# Altium PCB PWM_Module_TYPE2242.PcbDoc
Units mm, origin at the board's own origin, x right, y up, seen from the top; angles counter-clockwise.
Board outline 42 x 21.99 mm, 4 copper layers (Top Layer, Int1 (GND), Int2 (PWR), Bottom Layer), stack 0.77 mm thick; 32 components, 51 nets, 150 pads, 89 vias.
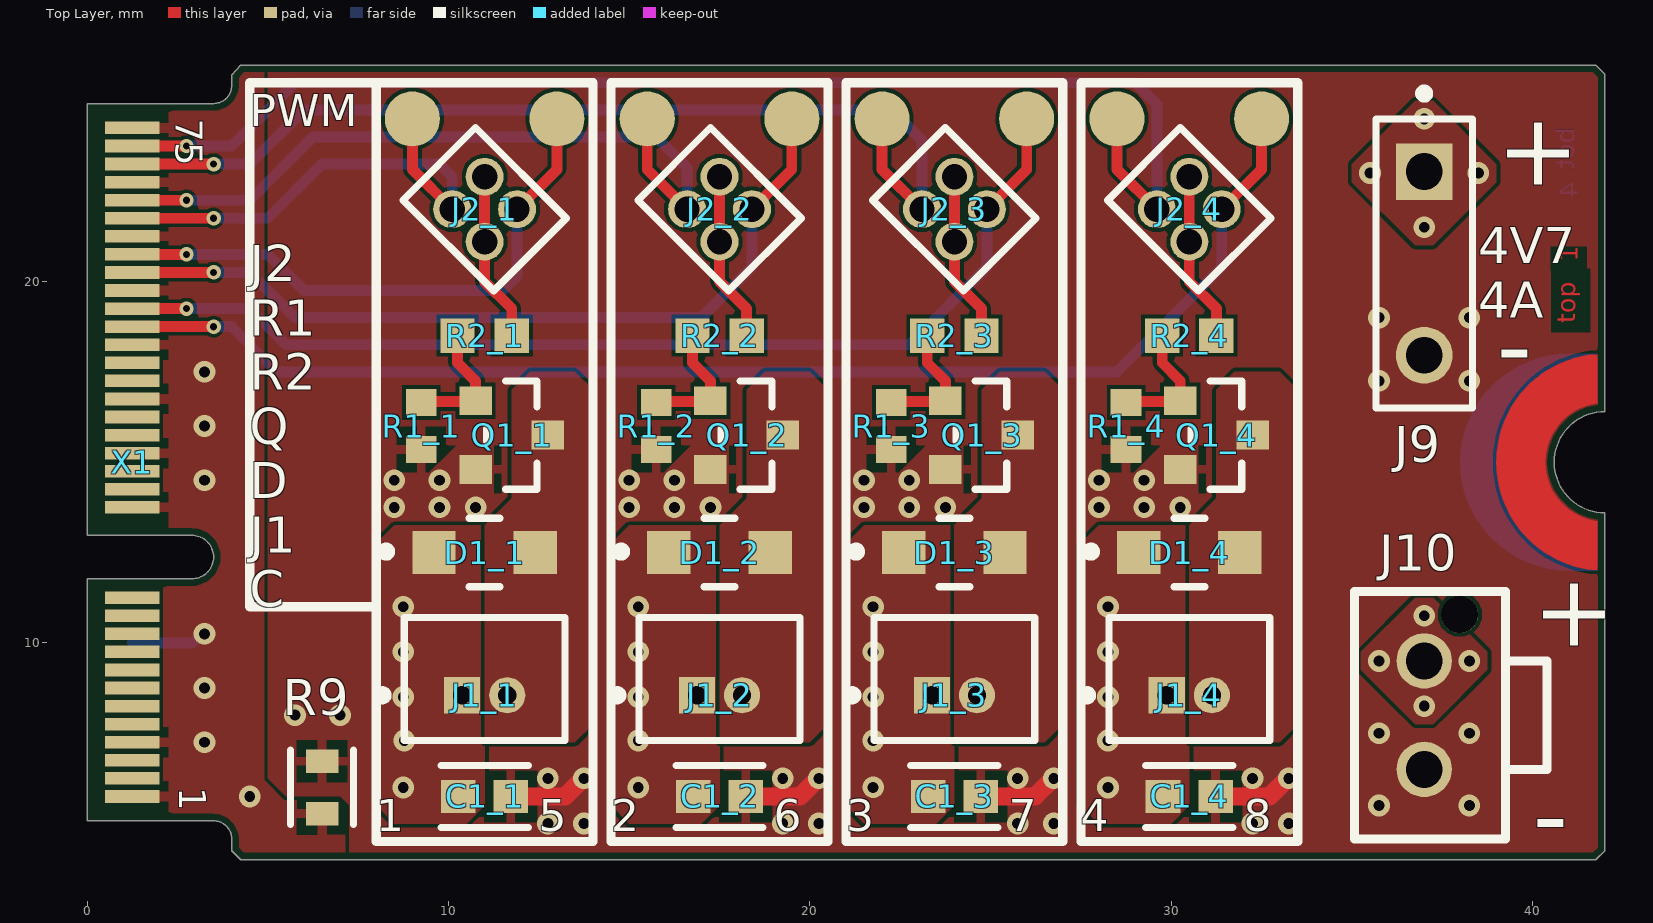
[diagram p0: Top Layer view]
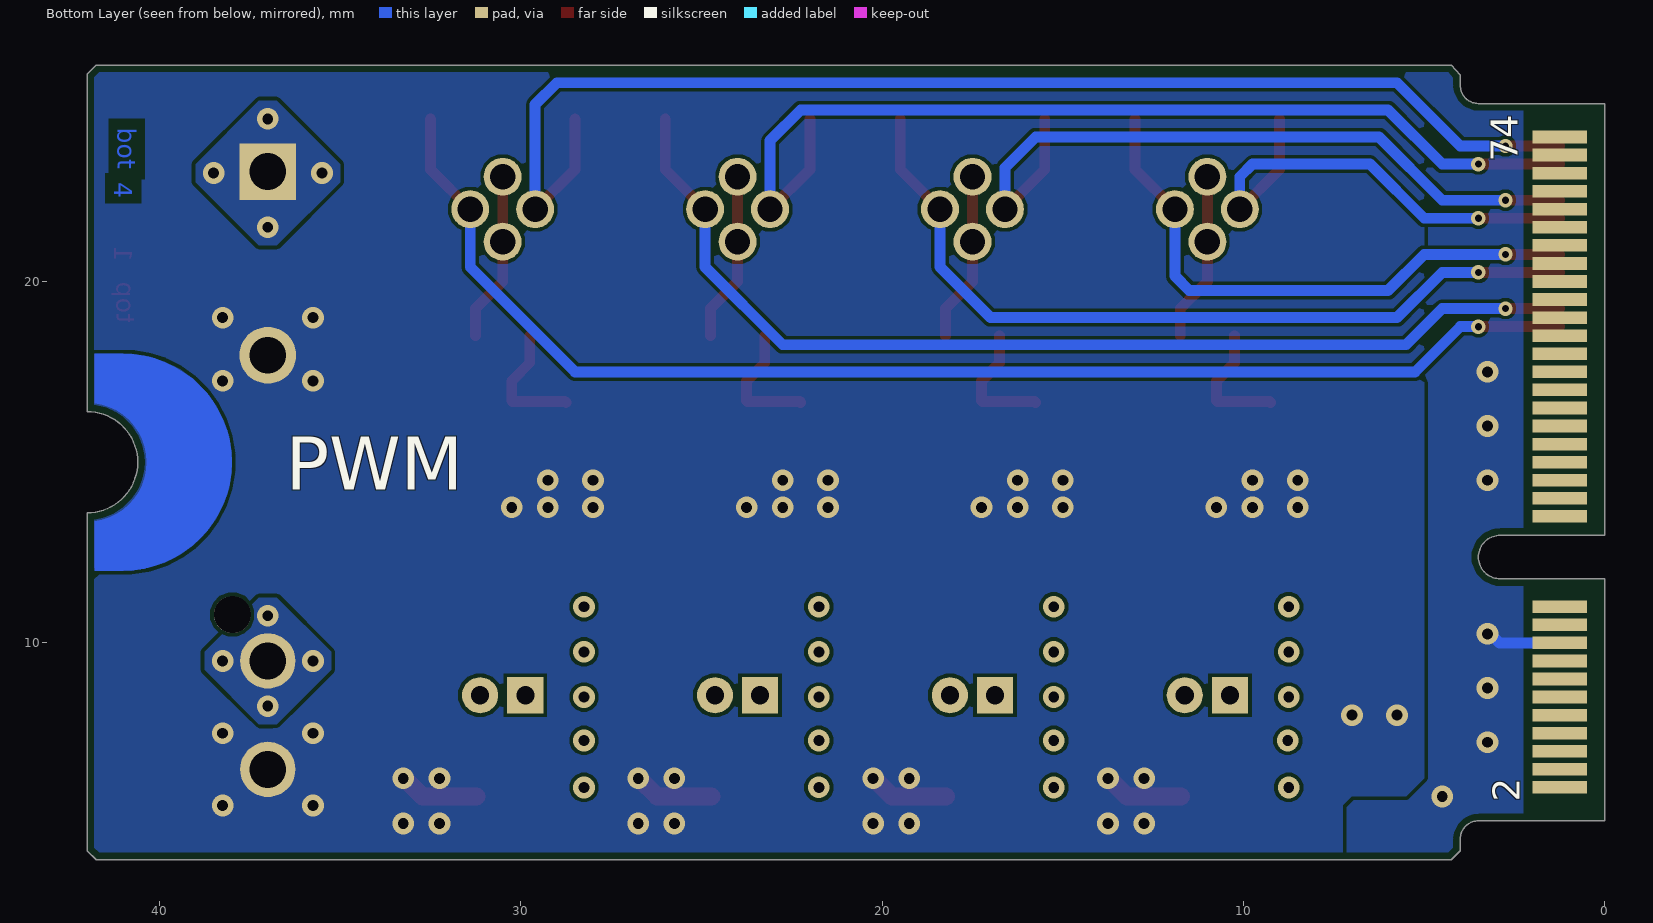
[diagram p1: Bottom Layer view, seen from below]
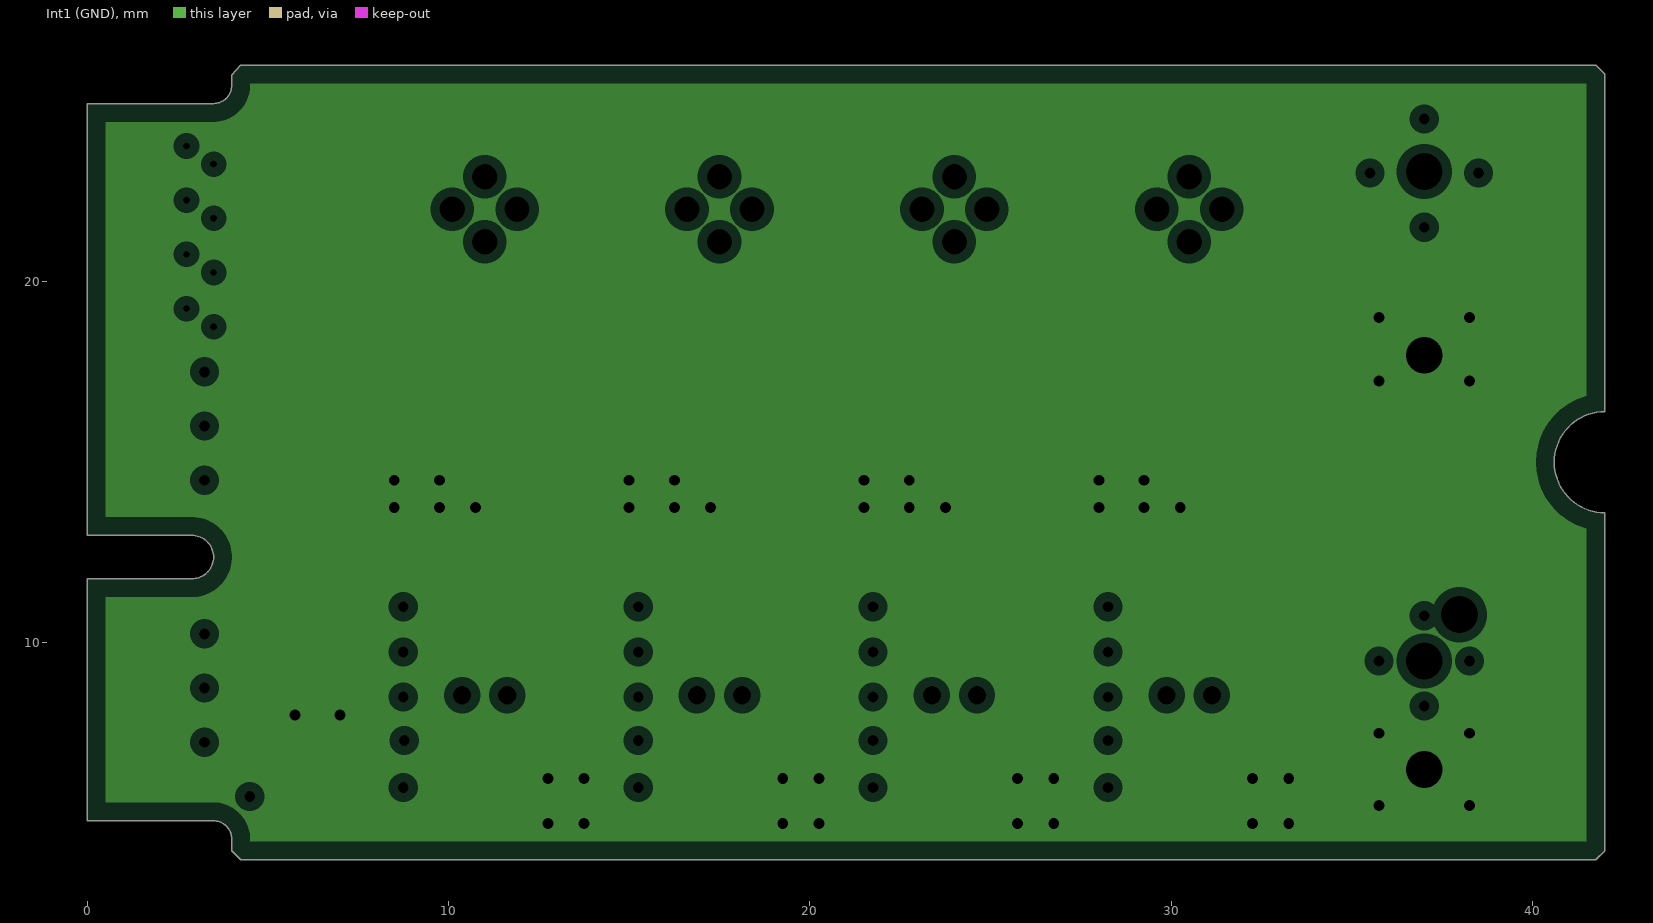
[diagram p2: Int1 (GND), clearances drawn from the general rule]
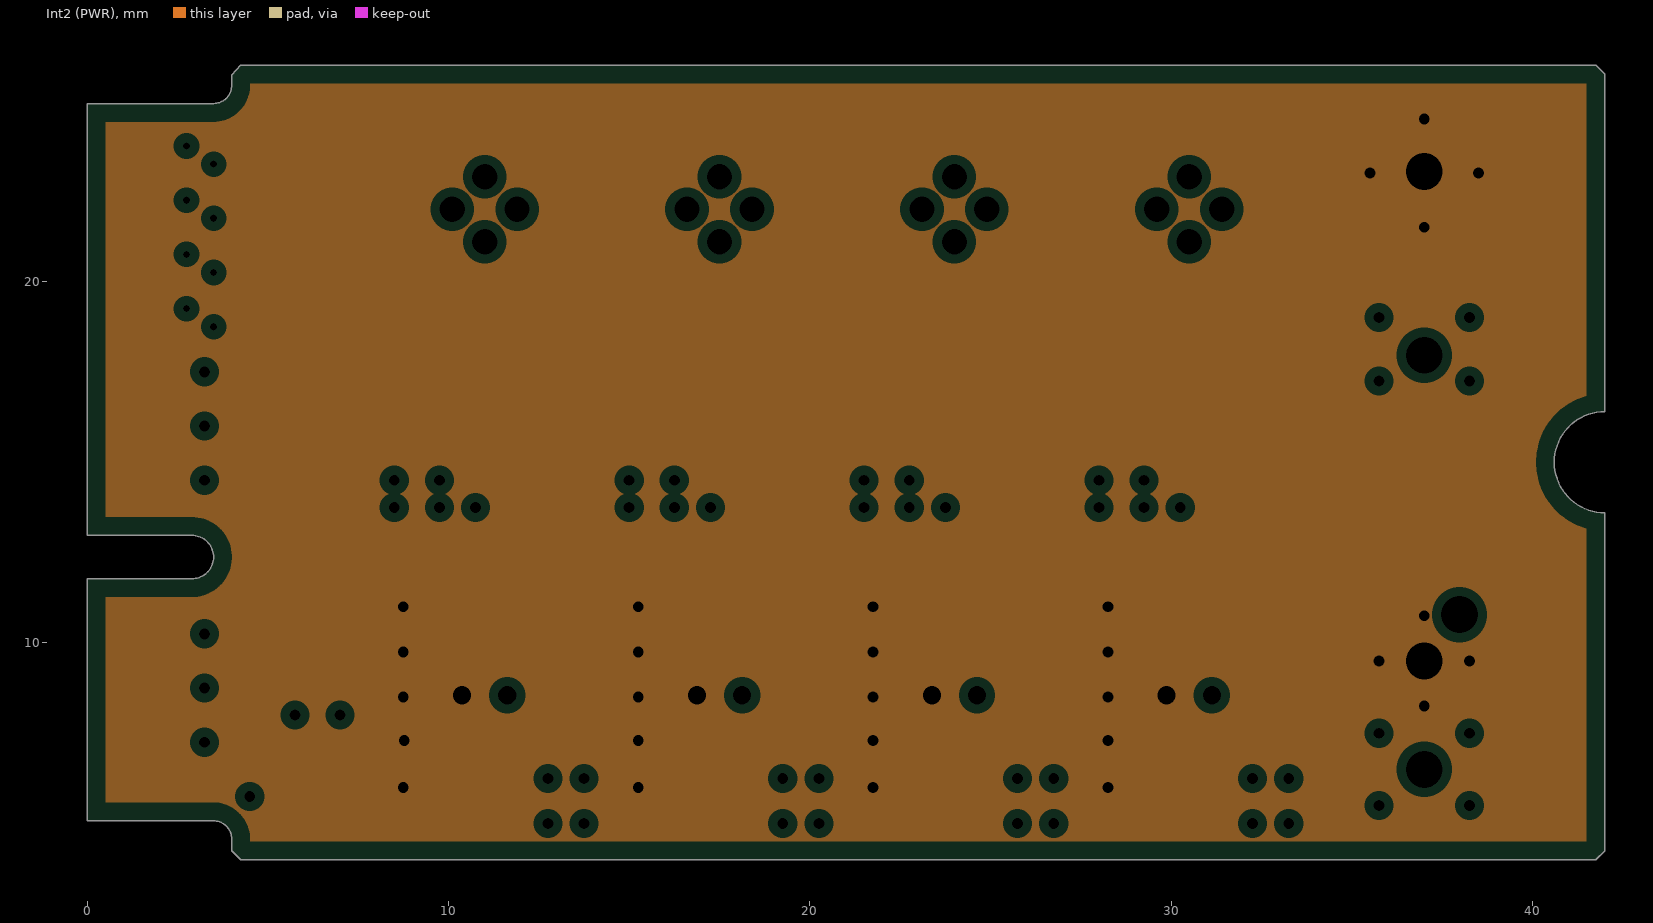
[diagram p3: Int2 (PWR), clearances drawn from the general rule]
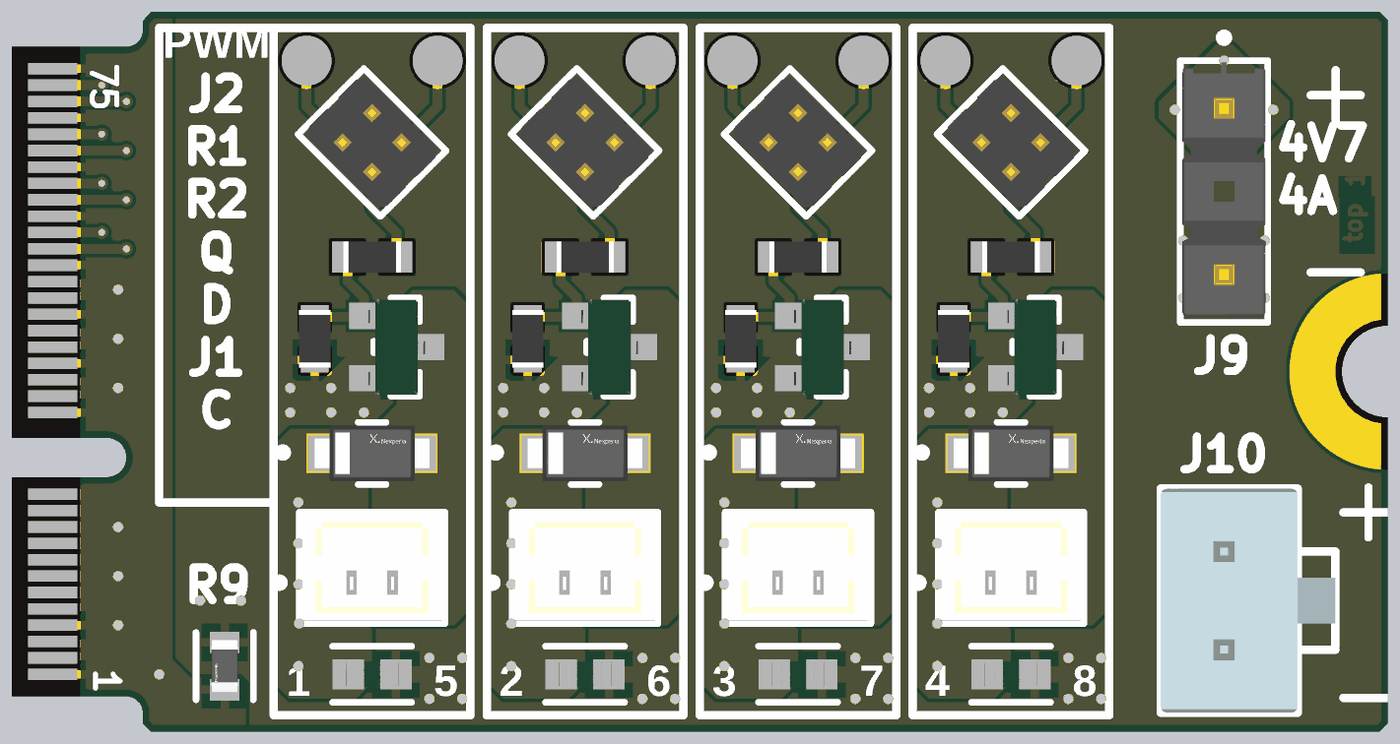
[diagram p4: 3D render of the assembled board from above, using the file's embedded part models]

## Layer stack, top to bottom
Top Solder: solder mask 0.0254, SM-001, Dk 4
Top Layer: signal copper 0.035
Dielectric 1: prepreg 0.1118, PP-015, Dk 4.3
Int1 (GND): plane copper 0.035, net BAT-
Dielectric 3: core 0.4064, Core-034, Dk 4.6
Int2 (PWR): plane copper 0.035, net BAT+
Dielectric 5: prepreg 0.1118, PP-015, Dk 4.3
Bottom Layer: signal copper 0.035
Bottom Solder: solder mask 0.0254, SM-001, Dk 4

## Board outline
4,4.25 4,4.575 ccw(c3.5,4.575) 3.5,5.075 0,5.075 0,11.775 2.9,11.775 ccw(c2.9,12.375) 3.5,12.375 ccw(c2.9,12.375) 2.9,12.975 0,12.975 0,24.925 3.5,24.925 ccw(c3.5,25.425) 4,25.425 4,25.713 4.25,25.988 41.75,25.988 42,25.738 42,16.4 ccw(c42,15) 40.6,15 ccw(c42,15) 42,13.6 42,4.25 41.75,4 4.25,4

## Design rules (kind name [scope] priority, off if disabled: settings)
BoardOutlineClearance [All] p1: gap=0.2 ignorepadtopadclearanceinfootprint=FALSE
Clearance [All] p1: gap=0.1 ignorepadtopadclearanceinfootprint=FALSE
DiffPairsRouting DiffPairsRouting_100R [InDifferentialPairClass('DP_100R')] p1: maxlimit=0.15 minlimit=0.15 mostfreqgap=0.15 toplayer_minwidth=0.11 toplayer_maxwidth=0.11 toplayer_prefwidth=0.11 bottomlayer_minwidth=0.11 bottomlayer_maxwidth=0.11 bottomlayer_prefwidth=0.11 impedanceprofiledriven=TRUE impedanceprofileid={D0ED966C-66EA-42B8-8657-787F2A77329B} impedanceprofilevalue=100.000000 maxuncoupledlength=12.7
DiffPairsRouting [All] p2: maxlimit=0.254 minlimit=0.254 mostfreqgap=0.254 toplayer_minwidth=0.381 toplayer_maxwidth=0.381 toplayer_prefwidth=0.381 bottomlayer_minwidth=0.381 bottomlayer_maxwidth=0.381 bottomlayer_prefwidth=0.381 maxuncoupledlength=12.7
MatchedLengths MatchedLengths_1 [InNetClass('S_GP2')] p1: tolerance=1 checknetsindiffpair=FALSE checkdiffpairvsdiffpair=TRUE checkxsignals=TRUE checkothers=TRUE
MatchedLengths [InNetClass('S_GP')] p2: tolerance=1 checknetsindiffpair=FALSE checkdiffpairvsdiffpair=TRUE checkxsignals=TRUE checkothers=TRUE
PlaneClearance [All] p1: clearance=0.254
PlaneConnect [All] p1: pad.planeconnectstyle=Relief pad.reliefexpansion=0.508 pad.reliefentries=4 pad.reliefconductorwidth=0.254 pad.reliefairgap=0.254 via.planeconnectstyle=Direct via.reliefexpansion=0.508 via.reliefentries=4 via.reliefconductorwidth=0.254 via.reliefairgap=0.254
PolygonConnect PolygonConnect_7 [All vs IsNamedPolygon('BAT-_L01_P029') Or IsNamedPolygon('BAT-_L01_P030') Or IsNamedPolygon('BAT-_L01_P031') Or IsNamedPolygon('BAT-_L01_P032')] p1: connectstyle=Direct reliefconductorwidth=0.254 reliefentries=4 polygonreliefangle="90 Angle" airgapwidth=0.254
PolygonConnect PolygonConnect_6 [All vs IsNamedPolygon('BAT-_L04_P021') Or IsNamedPolygon('BAT-_L04_P021')] p2: connectstyle=Direct reliefconductorwidth=0.254 reliefentries=4 polygonreliefangle="90 Angle" airgapwidth=0.254
PolygonConnect PolygonConnect_5 [All vs IsNamedPolygon('BAT-_L01_P025') Or IsNamedPolygon('BAT-_L01_P026')] p3: connectstyle=Direct reliefconductorwidth=0.254 reliefentries=4 polygonreliefangle="90 Angle" airgapwidth=0.254
PolygonConnect PolygonConnect_4 [All vs IsNamedPolygon('BAT+_L04_P000') Or IsNamedPolygon('BAT+_L04_P020')] p4: connectstyle=Direct reliefconductorwidth=0.254 reliefentries=4 polygonreliefangle="90 Angle" airgapwidth=0.254
PolygonConnect PolygonConnect_3 [All vs IsNamedPolygon('BAT+_L01_P018') Or IsNamedPolygon('BAT+_L01_P019')] p5: connectstyle=Direct reliefconductorwidth=0.254 reliefentries=4 polygonreliefangle="90 Angle" airgapwidth=0.254
PolygonConnect PolygonConnect_2 [All vs IsNamedPolygon('BAT+_L01_PWM1') Or IsNamedPolygon('BAT+_L01_PWM2') Or IsNamedPolygon('BAT+_L01_PWM3') Or IsNamedPolygon('BAT+_L01_PWM4')] p6: connectstyle=Direct reliefconductorwidth=0.254 reliefentries=4 polygonreliefangle="90 Angle" airgapwidth=0.254
PolygonConnect PolygonConnect_1 [All vs IsNamedPolygon('SW1_L01_PWM1') Or IsNamedPolygon('SW2_L01_PWM2') Or IsNamedPolygon('SW3_L01_PWM3') Or IsNamedPolygon('SW4_L01_PWM4')] p7: connectstyle=Direct reliefconductorwidth=0.254 reliefentries=4 polygonreliefangle="90 Angle" airgapwidth=0.254
PolygonConnect [All] p8: thpad.connectstyle=Relief thpad.reliefconductorwidth=0.254 thpad.reliefentries=4 thpad.polygonreliefangle="90 Angle" thpad.airgapwidth=0.254 smdpad.connectstyle=Relief smdpad.reliefconductorwidth=0.254 smdpad.reliefentries=4 smdpad.polygonreliefangle="90 Angle" smdpad.airgapwidth=0.254 via.connectstyle=Direct via.reliefconductorwidth=0.254 via.reliefentries=4 via.polygonreliefangle="90 Angle" via.airgapwidth=0.254
RoomDefinition PWM3 [InComponentClass('PWM3')] p1: confinementstyle=ConfineIn formatcopy=TRUE lockcomponents=FALSE outline 27,4.5 27,25.5 21,25.5 21,4.5
RoomDefinition PWM4 [InComponentClass('PWM4')] p2: confinementstyle=ConfineIn formatcopy=TRUE lockcomponents=FALSE outline 33.5,4.5 33.5,25.5 27.5,25.5 27.5,4.5
RoomDefinition PWM2 [InComponentClass('PWM2')] p3: confinementstyle=ConfineIn formatcopy=TRUE lockcomponents=FALSE outline 20.5,4.5 20.5,25.5 14.5,25.5 14.5,4.5
RoomDefinition PWM1 [InComponentClass('PWM1')] p4: confinementstyle=ConfineIn formatcopy=TRUE lockcomponents=FALSE outline 14,4.5 14,25.5 8,25.5 8,4.5
RoutingVias [All] p1: holewidth=0.2 width=0.4 viastyle="Through Hole" minholewidth=0.2 minwidth=0.4 maxholewidth=3 maxwidth=6
SolderMaskExpansion [All] p1: expansion=0.102 istentingtop=FALSE
Width Width_50R [InNetClass('SE_50R')] p1: maxlimit=0.172 minlimit=0.172 preferedwidth=0.172 impedanceprofiledriven=TRUE impedanceprofileid={CEA07893-88F1-4413-85C8-7467995CDE0A} impedanceprofilevalue=50.000000 minimp=50.000000 maximp=50.000000 favimp=50.000000
Width [All] p2: maxlimit=4 minlimit=0.1 preferedwidth=0.125
27 further rules are at their usual default settings.

## Classes and differential pairs
component class PWM4: C1_4 D1_4 J1_4 J2_4 Q1_4 R1_4 R2_4
component class PWM2: C1_2 D1_2 J1_2 J2_2 Q1_2 R1_2 R2_2
component class PWM1: C1_1 D1_1 J1_1 J2_1 Q1_1 R1_1 R2_1
component class PWM3: C1_3 D1_3 J1_3 J2_3 Q1_3 R1_3 R2_3
differential pair class DP_100R: FMC_GP_D1 FMC_GP_D2 FMC_GP_D3 FMC_GP_D4 FMC_GP_D5 FMC_GP_D6 FMC_GP_D7
net class SE_50R: FMC_GP_S0 FMC_GP_S1 FMC_GP_S2 FMC_GP_S3 FMC_GP_S4 FMC_GP_S5 FMC_GP_S6
net class S_GP: FMC_GP_S0 FMC_GP_S1 FMC_GP_S2 FMC_GP_S3 FMC_GP_S4 FMC_GP_S5 FMC_GP_S6
net class FMC_GP_S[0..7]: FMC_GP_S0 FMC_GP_S1 FMC_GP_S2 FMC_GP_S3 FMC_GP_S4 FMC_GP_S5 FMC_GP_S6 FMC_GP_S7
net class FMC_GP_D_P[0..7]: FMC_GP_D_P0 FMC_GP_D_P1 FMC_GP_D_P2 FMC_GP_D_P3 FMC_GP_D_P4 FMC_GP_D_P5 FMC_GP_D_P6 FMC_GP_D_P7
net class FMC_GP_D_N[0..7]: FMC_GP_D_N0 FMC_GP_D_N1 FMC_GP_D_N2 FMC_GP_D_N3 FMC_GP_D_N4 FMC_GP_D_N5 FMC_GP_D_N6 FMC_GP_D_N7
net class DP_GP: FMC_GP_D_N1 FMC_GP_D_N2 FMC_GP_D_N3 FMC_GP_D_N4 FMC_GP_D_N5 FMC_GP_D_N6 FMC_GP_D_N7 FMC_GP_D_P1 FMC_GP_D_P2 FMC_GP_D_P3 FMC_GP_D_P4 FMC_GP_D_P5 FMC_GP_D_P6 FMC_GP_D_P7
component class connector: X1
differential pair FMC_GP_D7: +FMC_GP_D_P7 -FMC_GP_D_N7
differential pair FMC_GP_D6: +FMC_GP_D_P6 -FMC_GP_D_N6
differential pair FMC_GP_D5: +FMC_GP_D_P5 -FMC_GP_D_N5
differential pair FMC_GP_D4: +FMC_GP_D_P4 -FMC_GP_D_N4
differential pair FMC_GP_D3: +FMC_GP_D_P3 -FMC_GP_D_N3
differential pair FMC_GP_D2: +FMC_GP_D_P2 -FMC_GP_D_N2
differential pair FMC_GP_D1: +FMC_GP_D_P1 -FMC_GP_D_N1

## Components (designator, comment, footprint, x,y, rotation, side; value= is the part's Value field where it differs from the comment)
C1_1 "22u" FP-CL10-IPC_B 11,5.75 r180 top
C1_2 "22u" FP-CL10-IPC_B 17.5,5.75 r180 top
C1_3 "22u" FP-CL10-IPC_B 24,5.75 r180 top
C1_4 "22u" FP-CL10-IPC_B 30.5,5.75 r180 top
D1_1 "PMEG4030ER,115" FP-SOD123W-MFG 11,12.5 r0 top
D1_2 "PMEG4030ER,115" FP-SOD123W-MFG 17.5,12.5 r0 top
D1_3 "PMEG4030ER,115" FP-SOD123W-MFG 24,12.5 r0 top
D1_4 "PMEG4030ER,115" FP-SOD123W-MFG 30.5,12.5 r0 top
J1_1 "53047-0210" FP-53047-0210-MFG 11,9 r180 top
J1_2 "53047-0210" FP-53047-0210-MFG 17.5,9 r180 top
J1_3 "53047-0210" FP-53047-0210-MFG 24,9 r180 top
J1_4 "53047-0210" FP-53047-0210-MFG 30.5,9 r180 top
J2_1 "62200421121" 62200421121 11,22 r45 top
J2_2 "62200421121" 62200421121 17.5,22 r45 top
J2_3 "62200421121" 62200421121 24,22 r45 top
J2_4 "62200421121" 62200421121 30.5,22 r45 top
J9 "TSW-202-07-G-S" FP-TSW-202-07-G-S-MFG 37,20.5 r270 top
J10 "2165713002" PCBComponent_1 37,8 r270 top
Q1_1 "DMN2004K-7" FP-SOT23-MFG 11.75,15.75 r0 top
Q1_2 "DMN2004K-7" FP-SOT23-MFG 18.25,15.75 r0 top
Q1_3 "DMN2004K-7" FP-SOT23-MFG 24.75,15.75 r0 top
Q1_4 "DMN2004K-7" FP-SOT23-MFG 31.25,15.75 r0 top
R1_1 "10k" RESC1609X55X30LL15T15 9.25,16 r90 top
R1_2 "10k" RESC1609X55X30LL15T15 15.75,16 r90 top
R1_3 "10k" RESC1609X55X30LL15T15 22.25,16 r90 top
R1_4 "10k" RESC1609X55X30LL15T15 28.75,16 r90 top
R2_1 "47R" RESC1608X55X30NL15T15 11,18.5 r0 top
R2_2 "47R" RESC1608X55X30NL15T15 17.5,18.5 r0 top
R2_3 "47R" RESC1608X55X30NL15T15 24,18.5 r0 top
R2_4 "47R" RESC1608X55X30NL15T15 30.5,18.5 r0 top
R9 "0R" FP-ERJ-3GEY0R00V-MFG 6.5,6 r90 top
X1 "CONN PWR CARD EDGE PCB SLOT MALE" CON-67_0.5MM_PCB_SLOT 1.25,15 r270 top locked

## Footprints (in the part's own frame and the unit in brackets; to place one, negate y for a bottom-side part, rotate by r counter-clockwise, add the part's x,y. Pads: shape width x height; smd on the part's side, far side on the other; paste and mask are expansions set on the pad)
62200421121 [mm] "Pin Header, pitch 1.27 mm, THT, Vertical, dual row, 4p"
  round 1.05 hole 0.7: 1(-0.635,-0.635) 2(-0.635,0.635) 3(0.635,-0.635) 4(0.635,0.635)
  silkscreen extent -1.42,-1.77 1.42,1.77, body extent -1.27,-1.7 1.27,1.7, height 5.33
CON-67_0.5MM_PCB_SLOT [mm] "Connector 67, 0.5mm pitch - No BOM"
  rect 0.35x1.5 smd: 1(9.25,0) 3(8.75,0) 5(8.25,0) 7(7.75,0) 9(7.25,0) 11(6.75,0) 13(6.25,0) 15(5.75,0) 17(5.25,0) 19(4.75,0) 21(4.25,0) 23(3.75,0) 33(1.25,0) 35(0.75,0) 37(0.25,0) 39(-0.25,0) 41(-0.75,0) 43(-1.25,0) 45(-1.75,0) 47(-2.25,0) 49(-2.75,0) 51(-3.25,0) 53(-3.75,0) 55(-4.25,0) 57(-4.75,0) 59(-5.25,0) 61(-5.75,0) 63(-6.25,0) 65(-6.75,0) 67(-7.25,0) 69(-7.75,0) 71(-8.25,0) 73(-8.75,0) 75(-9.25,0)
  rect 0.35x1.5 smd far side: 2(9,0) 4(8.5,0) 6(8,0) 8(7.5,0) 10(7,0) 12(6.5,0) 14(6,0) 16(5.5,0) 18(5,0) 20(4.5,0) 22(4,0) 32(1.5,0) 34(1,0) 36(0.5,0) 38(0,0) 40(-0.5,0) 42(-1,0) 44(-1.5,0) 46(-2,0) 48(-2.5,0) 50(-3,0) 52(-3.5,0) 54(-4,0) 56(-4.5,0) 58(-5,0) 60(-5.5,0) 62(-6,0) 64(-6.5,0) 66(-7,0) 68(-7.5,0) 70(-8,0) 72(-8.5,0) 74(-9,0)
FP-53047-0210-MFG [mm]
  rect 1x1 hole 0.5 paste-1000 mask+0: 1(0.625,0.45)
  round 1 hole 0.5 paste-1000 mask+0: 2(-0.625,0.45)
  silkscreen extent -2.22,-1.7 2.95,1.7, body extent -2.32,-1.8 2.32,1.8, height 0.25
FP-CL10-IPC_B [mm]
  rect 0.958x0.912 smd paste+0 mask+0: 1(-0.727,0) 2(0.727,0)
  silkscreen extent -1.21,-0.86 1.21,0.86, body extent -1.46,-0.71 1.46,0.71, height 0.25
FP-ERJ-3GEY0R00V-MFG [mm]
  rect 0.65x0.9 smd paste+0 mask+0: 1(-0.725,0) 2(0.725,0)
  silkscreen extent -1.03,-0.87 1.03,0.87, body extent -1.15,-0.58 1.15,0.58, height 0.25
FP-SOD123W-MFG [mm]
  rect 1.2x1.2 smd paste-1000 mask+0: 1(-1.4,0) 2(1.4,0)
  silkscreen extent -2.85,-0.95 0.43,0.95, body extent -2.2,-1.05 2.2,1.05, height 0.25
FP-SOT23-MFG [mm]
  rect 0.9x0.8 smd paste+0 mask+0: 1(-1,0.95) 2(-1,-0.95) 3(1,0)
  silkscreen extent -0.7,-1.5 0.7,1.5, body extent -1.55,-1.6 1.55,1.6, height 0.25
FP-TSW-202-07-G-S-MFG [mm]
  rect 1.57x1.57 hole 1.02 paste-1000 mask+0: 1(-2.54,0)
  round 1.57 hole 1.02 paste-1000 mask+0: 2(2.54,0)
  silkscreen extent -4.82,-1.34 4,1.34, body extent -4.1,-1.44 4.1,1.44, height 0.25
PCBComponent_1 [mm]
  round 1.53 hole 1.02: 1(1.5,0) 2(-1.5,0)
  round 1.02 hole 1.02 unplated: H(-2.78,0.98)
  silkscreen extent -3.42,-1.93 3.42,3.4, body extent -3.42,-1.93 3.42,3.4, height 9.91
RESC1608X55X30NL15T15 [mm] "Chip Resistor, 2-Leads, Body 1.75x0.95mm, IPC Medium Density"
  rect 0.95x0.95 smd: 1(-0.75,0) 2(0.75,0)
  body extent -0.87,-0.48 0.87,0.48, height 0.55
RESC1609X55X30LL15T15 [mm] "Chip Resistor, 2-Leads, Body 1.75x0.95mm, IPC High Density"
  rect 0.75x0.85 smd: 1(-0.65,0) 2(0.65,0)
  body extent -0.87,-0.48 0.87,0.48, height 0.55

## Part data
C1_1 C1_2 C1_3 C1_4: library part CMP-13271-002755-1, "Cap Ceramic 22uF 16V X5R ±20% Pad SMD 0603 +85°C T/R", Capacitance=22uF, Case Code (Imperial)=0603, Case Code (Metric)=1608, Manufacturer=Samsung, Max Operating Temperature=85°C, Min Operating Temperature=-55°C, Tolerance=20%, Voltage Rating=16V, Case/Package=0603, Mount="Surface Mount", P/N=CL10A226MO7JZNC, Packaging="Tape and Reel", Supplier=Digi-Key, Supplier P/N=1276-7076-1-ND
  C1_1: ClassName=PWM1
  C1_2: ClassName=PWM2
  C1_3: ClassName=PWM3
  C1_4: ClassName=PWM4
D1_1 D1_2 D1_3 D1_4: library part CMP-14398-000026-1, "DIODE SCHOTTKY 40V 3A SOD123W", Manufacturer="Nexperia USA Inc.", P/N=PMEG4030ER,115, RoHS Compliant=Yes, Supplier=Digi-Key, Supplier P/N=1727-5313-1-ND
  D1_1: ClassName=PWM1
  D1_2: ClassName=PWM2
  D1_3: ClassName=PWM3
  D1_4: ClassName=PWM4
J1_1 J1_2 J1_3 J1_4: library part CMP-2000-05628-3, "CONN HEADER VERT 2POS 1.25MM", Ambient Temperature Range High=+85°C, Ambient Temperature Range Low=-40°C, Current Rating=1A, Manufacturer=Molex, Package=0, Temperature="-40°C to +85°C", Voltage Rating=125V, Automotive=No, Category=Conn, ComponentLink2Description=Datasheet, ComponentLink2URL=http://www.molex.com/webdocs/datasheets/pdf/en-us/0530470210_PCB_HEADERS.pdf, Conn Gender=Male, Conn Orientation=Vertical, Contact Material=Tin, Device Class L1=Connectors, Device Class L2="Headers and Wire Housings", Device Class L3=unset, Digikey Description="CONN HEADER VERT 2POS 1.25MM", Footprint Url=https://www.molex.com/pdm_docs/sd/530470210_sd.pdf, Height=4.4mm, Lead Free=Yes, Manufacturer Part Number=53047-0210, Mouser Description="1.25mm Pitch PicoBlade™ Wire-to-Board Header, Vertical, with Friction Lock, 2 Circuits", Number of Contacts=2, Number of Rows=1, Octopart=https://octopart.com/53047-0210-molex-276772, P/N=0530470210, Pitch=1.25mm, RoHS=TRUE, Supplier=Digi-Key, Supplier P/N=WM1731-ND, Temperature Range High=+85°C, Temperature Range Low=-40°C
  J1_1: ClassName=PWM1
  J1_2: ClassName=PWM2
  J1_3: ClassName=PWM3
  J1_4: ClassName=PWM4
J2_1 J2_2 J2_3 J2_4: library part CMP-1502-00946-1, "THT Vertical Pin Header WR-PHD, Pitch 1.27 mm, Dual Row, 4 pins", Contact Resistance=20mOhm, Manufacturer="Wurth Elektronik", Operating Temperature=-40to105degC, Rated Current=1A, Withstanding Voltage=500VAC, Working Voltage=100VAC, Datasheet URL=https://katalog.we-online.de/em/datasheet/62200421121.pdf, Gender=Male, Manufacturer URL=http://www.we-online.de, Mounting Technology=THT, Orientation=Vertical, P/N=62200421121, Package Reference=62200421121, Packaging=Box, Part Number=62200421121, Pin Number=4, Pitch=1.27mm, Publisher=WurthElektronik, Row Number=Dual, Supplier=Digi-Key, Supplier P/N=732-5372-ND
  J2_1: ClassName=PWM1
  J2_2: ClassName=PWM2
  J2_3: ClassName=PWM3
  J2_4: ClassName=PWM4
J9: library part CMP-02766-000055-1, "CONN HEADER VERT 2POS 5.08MM", Current Rating=6.3A, Manufacturer=Samtec, Package=0, Temperature="-55°C to +125°C", Temperature Range High=+125°C, Temperature Range Low=-55°C, Voltage Rating=550V, Automotive=No, Category=Conn, ComponentLink2Description=Datasheet, ComponentLink2URL=http://suddendocs.samtec.com/prints/tsw-xxx-xx-xxx-x-xx-xxx-mkt.pdf, Conn Gender=Male, Conn Orientation=Vertical, Contact Material=Gold,Nickel, Device Class L1=Connectors, Device Class L2="Headers and Wire Housings", Device Class L3=unset, Digikey Description="CONN HEADER VERT 2POS 5.08MM", Footprint Url=http://suddendocs.samtec.com/prints/tsw-xxx-xx-x-x-xx-xxx-footprint.pdf, Height=8.71mm, Lead Free=Yes, Manufacturer Part Number=TSW-202-07-G-S, Number of Contacts=2, Number of Rows=1, Octopart=https://octopart.com/tsw-202-07-g-s-samtec-13117432, P/N=TSW-202-07-G-S, Pitch=5.08mm, RoHS=TRUE, Supplier=Digi-Key, Supplier P/N=SAM13323-ND
J10: "Micro-Fit+ Vertical Header, Through Hole, 3.00mm Pitch, Single Row, 2 Circuits, 0.76µm Gold (Au) Plating, Glow-Wire Capable, Black", Manufacturer=Molex, P/N=2165713002, Supplier=Digi-Key, Supplier P/N=900-2165713002-ND
Q1_1 Q1_2 Q1_3 Q1_4: library part CMP-12801-000057-1, "MOSFET N-CH 20V 0.63A SOT23-3", Continuous Drain Current=630mA, Drain To Source Breakdown Voltage=20V, Drain To Source Resistance=0.4Ω, Gate To Source Voltage=8V, Input Capacitace At Vds="150pF @ 16V", Manufacturer="Diodes Inc.", Max Forward Diode Voltage=1V, Max Junction Temp=+150°C, Package=SOT23, Power Dissipation=350mW, Pulse Drain Current=1.5A, Temperature="-65°C to +150°C", Temperature Range Low=-65°C, Automotive=Yes, Automotive Grade="Grade 0", Category=Trans, ComponentLink2Description=Datasheet, ComponentLink2URL=https://www.diodes.com/assets/Datasheets/ds30938.pdf, Depletion Mode=False, Device Class L1="Discrete Semiconductors", Device Class L2=Transistors, Device Class L3=MOSFETs, Digikey Description="MOSFET N-CH 20V 0.63A SOT23-3", Drain To Source Voltage=20V, Footprint Url=https://www.diodes.com/assets/Package-Files/SOT23.pdf, Gate Charge At Vgs="0.9nC @ 4.5V", Height=1.1mm, Lead Free=Yes, Manufacturer Part Number=DMN2004K-7, Mouser Description="MOSFET 20V 540mA", Number Of Channels=1, Number Of N Channels=1, Octopart=https://octopart.com/dmn2004k-7-diodes+inc.-7127688, P/N=DMN2024UQ-7, Reverse Recovery Charge=0.85nC, Reverse Recovery Time=5.5ns, RoHS=TRUE, Rthja Max=357°C/W, Standoff Height=0.013mm, Supplier=Digi-Key, Supplier P/N=31-DMN2024UQ-7CT-ND, Temperature Range High=+150°C, Threshold Vgs Max=1V, Threshold Vgs Min=0.5V, Turn Off Delay Time=59.4ns, Turn On Delay Time=5.7ns
  Q1_1: ClassName=PWM1
  Q1_2: ClassName=PWM2
  Q1_3: ClassName=PWM3
  Q1_4: ClassName=PWM4
R1_1 R1_2 R1_3 R1_4: library part CMP-1012-00623-3, "Chip Resistor, 10 KOhm, +/- 1%, 0.1 W, -55 to 155 degC, 0603 (1608 Metric), RoHS, Tape and Reel", Case Code (Imperial)=0603, Case Code (Metric)=1608, Manufacturer=Panasonic, Max Operating Temperature=155degC, Max Power Dissipation=100mW, Min Operating Temperature=-55degC, Package Description="2-Pin Surface Mount Device, Body 1.6 x 0.85 mm", Package Quantity=1, Package Reference=603, Resistance=10KOhm, Temperature Coefficient=100ppm\/degreesC, Tolerance=1%, Voltage Rating=75V, Case\/Package=0603, Composition=ThickFilm, Contact Plating=Tin, Datasheet URL=https://industrial.panasonic.com/cdbs/www-data/pdf/RDA0000/AOA0000C304.pdf, Datasheet Version=02/2017, Depth=0.8mm, Height=0.45mm, Lead Free=LeadFree, Length=1.6mm, Manufacturer URL=http://www.panasonic.com/, Military Standard=Not, Mount=SurfaceMount, Mounting Technology=SurfaceMount, Number of Pins=2, Number of Terminations=2, P/N=ERJ-3EKF1002V, Packaging=TapeandReel, Power Rating=100mW, Radiation Hardening=No, REACH SVHC=NoSVHC, RoHSCompliant=true, Supplier=Digi-Key, Supplier P/N=P10.0KHCT-ND, Termination=SMD/SMT, Voltage Rating (DC)=75V, Width=0.031inch
  R1_1: ClassName=PWM1
  R1_2: ClassName=PWM2
  R1_3: ClassName=PWM3
  R1_4: ClassName=PWM4
R2_1 R2_2 R2_3 R2_4: library part CMP-2000-00529-2, "Chip Resistor, 47 Ohm, +/- 1%, 0.1 W, -55 to 155 degC, 0603 (1608 Metric), RoHS, Tape and Reel", Case Code (Imperial)=0603, Case Code (Metric)=1608, Manufacturer=Panasonic, Max Operating Temperature="155 degC", Min Operating Temperature="-55 degC", Package Quantity=5000, Power Rating="100 mW", Resistance="6.8 kohm", Tolerance=1%, Voltage Rating="50 V", Case\Package=0603, ComponentLink1Description="Manufacturer URL", ComponentLink1URL=http://www.panasonic.com/, ComponentLink2Description=Datasheet, ComponentLink2URL=http://industrial.panasonic.com/cdbs/www-data/pdf/RDA0000/AOA0000C86.pdf, DatasheetVersion=Apr-15, Height="0.45 mm", Length="1.6 mm", Mount="Surface Mount", P/N=ERJ-3EKF47R0V, PackageDescription="2-Pin Surface Mount Device, Body 1.6 x 0.85 mm", PackageReference=0603, Packaging="Tape and Reel", Pins=2, REACH SVHC="No SVHC", RoHSCompliant=true, Supplier=Digi-Key, Supplier P/N=P47.0HCT-ND, Voltage Rating (DC)="50 V", Width="0.8 mm"
  R2_1: ClassName=PWM1
  R2_2: ClassName=PWM2
  R2_3: ClassName=PWM3
  R2_4: ClassName=PWM4
R9: library part CMP-2000-00700-2, "RES SMD 0 OHM JUMPER 1/10W 0603", Manufacturer=Panasonic, Manufacturer Part Number=ERJ-3GEY0R00V, Package=0603, Power Rating=0.1W, Resistance=0Ω, Temperature="-55°C to +155°C", Temperature Coefficient=-100/+600ppm/°C, Temperature Range High=+155°C, Temperature Range Low=-55°C, Tolerance=5%, Voltage Rating=75V, Automotive=Yes, Automotive Grade="Grade 0", Category=Res, ComponentLink2Description=Datasheet, ComponentLink2URL=https://industrial.panasonic.com/cdbs/www-data/pdf/RDA0000/AOA0000C301.pdf, Composition="Thick Film", Device Class L1="Passive Components", Device Class L2=Resistors, Device Class L3="Chip SMD Resistors", Digikey Description="RES SMD 0 OHM JUMPER 1/10W 0603", Footprint Url=https://industrial.panasonic.com/cdbs/www-data/pdf/RDA0000/DMA0000COL17.pdf, Height=0.55mm, Ipc Land Pattern Name=RESC16080X45, Lead Free=Yes, Mouser Description="Resistor, Chip Thick Film, 0 Ohm, 0.1w, Resistor, Chip Thick Film, 0 Ohm, 0.1w, 5%", Octopart=https://octopart.com/erj-3gey0r00v-panasonic-55389238, P/N=ERJ-3GEY0R00V, RoHS=TRUE, Series=ERJ, Supplier=Digi-Key, Supplier P/N=P0.0GCT-ND
X1: library part CMP-01224-1, "Mates with 2199119-4 - No BOM", Card Thickness=0.8mm, Card Type="Non Specified - Dual Edge", Gender=Male, Mates with=2199119-4, Number of Positions=67, Pitch=0.5mm

## Free pads (board coordinates)
  round 1.524 smd: 27(9,24.5) 28(13,24.5) 29(15.5,24.5) 30(19.5,24.5) 31(22,24.5) 32(26,24.5) 33(28.5,24.5) 34(32.5,24.5)

## Via types
v1: diameter 0.6, hole 0.3, Top Layer to Bottom Layer, tented both sides, 81 vias
v2: diameter 0.4, hole 0.2, Top Layer to Bottom Layer, tented both sides, 8 vias

## Nets (pads, with @x,y where several pads share a name; then routed paths per layer and width w, separated by ;. In a path a pad name is that pad's centre, name@x,y a point inside that pad or via, vN(x,y) a via of type N, cw(c..) or ccw(c..) an arc to the next point about the centre after c; other vN are vias at no path point)
BAT+: C1_1.2 C1_2.2 C1_3.2 C1_4.2 D1_1.1 D1_2.1 D1_3.1 D1_4.1 J1_1.1 J1_2.1 J1_3.1 J1_4.1 J9.1 J10.2
  other v1: 8.75,6 15.25,6 21.75,6 28.25,6 8.775,7.3 15.25,7.3 21.75,7.3 28.25,7.3 37,8.25 8.75,8.5 15.25,8.5 21.75,8.5 28.25,8.5 35.75,9.5 38.25,9.5 8.75,9.75 15.25,9.75 21.75,9.75 28.25,9.75 37,10.75 8.75,11 15.25,11 21.75,11 28.25,11 37,21.5 35.5,23 38.5,23 37,24.5
BAT-: C1_1.1 C1_2.1 C1_3.1 C1_4.1 J9.2 J10.1 Q1_1.2 Q1_2.2 Q1_3.2 Q1_4.2 R1_1.1 R1_2.1 R1_3.1 R1_4.1 R9.2 | length 8.9
  Top Layer w0.5: C1_1.1 13.223,5.75 13.723,6.25 v1(13.75,6.25) ; C1_2.1 19.723,5.75 20.223,6.25 v1(20.25,6.25) ; C1_3.1 26.223,5.75 26.723,6.25 v1(26.75,6.25) ; C1_4.1 32.723,5.75 33.223,6.25 v1(33.25,6.25)
  other v1: 12.75,5 13.75,5 19.25,5 20.25,5 25.75,5 26.75,5 32.25,5 33.25,5 35.75,5.5 38.25,5.5 12.75,6.25 19.25,6.25 25.75,6.25 32.25,6.25 35.75,7.5 38.25,7.5 5.75,8 7,8 8.5,13.75 9.75,13.75 10.75,13.75 15,13.75 16.25,13.75 17.25,13.75 21.5,13.75 22.75,13.75 23.75,13.75 28,13.75 29.25,13.75 30.25,13.75 8.5,14.5 9.75,14.5 15,14.5 16.25,14.5 21.5,14.5 22.75,14.5 28,14.5 29.25,14.5 35.75,17.25 38.25,17.25 35.75,19 38.25,19
FMC_12V: X1.38
FMC_GP_D_N0: X1.5
FMC_GP_D_N1: X1.37
FMC_GP_D_N2: X1.43
FMC_GP_D_N3: X1.49
FMC_GP_D_N4: J2_3.3 pad.32 X1.55 | length 29.5
  Top Layer w0.3: X1.55 v2(2.75,19.25) ; J2_3.3 26,23.102 pad.32
  Bottom Layer w0.3: v2(2.75,19.25) 4.5,19.25 5.5,18.25 22.75,18.25 24.898,20.398 J2_3.3
FMC_GP_D_N5: J2_1.3 pad.28 X1.61 | length 16
  Top Layer w0.3: X1.61 v2(2.75,20.75) ; J2_1.3 13,23.102 pad.28
  Bottom Layer w0.3: v2(2.75,20.75) 5,20.75 6,19.75 11.5,19.75 11.898,20.148 J2_1.3
FMC_GP_D_N6: J2_2.2 pad.29 X1.67 | length 20.6
  Top Layer w0.3: X1.67 v2(2.75,22.25) ; pad.29 15.5,23.102 J2_2.2
  Bottom Layer w0.3: v2(2.75,22.25) 4.5,22.25 6.25,24 15.75,24 16.602,23.148 16.602,22.204 16.5,22.102 J2_2.2
FMC_GP_D_N7: J2_4.2 pad.33 X1.73 | length 35.2
  Top Layer w0.3: X1.73 v2(2.75,23.75) ; pad.33 28.5,23.102 J2_4.2
  Bottom Layer w0.3: v2(2.75,23.75) 4,23.75 5.75,25.5 29,25.5 29.602,24.898 J2_4.2
FMC_GP_D_P0: X1.3
FMC_GP_D_P1: X1.35
FMC_GP_D_P2: X1.41
FMC_GP_D_P3: X1.47
FMC_GP_D_P4: J2_4.3 pad.34 X1.53 | length 36.4
  Top Layer w0.3: X1.53 v2(3.5,18.75) ; J2_4.3 32.5,23.102 pad.34
  Bottom Layer w0.3: v2(3.5,18.75) 4,18.75 5.25,17.5 28.5,17.5 31.398,20.398 J2_4.3
FMC_GP_D_P5: J2_2.3 pad.30 X1.59 | length 22.8
  Top Layer w0.3: X1.59 v2(3.5,20.25) ; J2_2.3 19.5,23.102 pad.30
  Bottom Layer w0.3: v2(3.5,20.25) 4.5,20.25 5.75,19 17,19 18.398,20.398 J2_2.3
FMC_GP_D_P6: J2_1.2 pad.27 X1.65 | length 13.5
  Top Layer w0.3: X1.65 v2(3.5,21.75) ; pad.27 9,23.102 J2_1.2
  Bottom Layer w0.3: v2(3.5,21.75) 5,21.75 6.5,23.25 9.75,23.25 10.102,22.898 J2_1.2
FMC_GP_D_P7: J2_3.2 pad.31 X1.71 | length 27.7
  Top Layer w0.3: X1.71 v2(3.5,23.25) ; pad.31 22,23.102 J2_3.2
  Bottom Layer w0.3: v2(3.5,23.25) 4.5,23.25 6,24.75 22.25,24.75 23.102,23.898 J2_3.2
FMC_GP_S0: X1.9
FMC_GP_S1: X1.11
FMC_GP_S2: X1.13
FMC_GP_S3: X1.15
FMC_GP_S4: X1.17
FMC_GP_S5: X1.19
FMC_GP_S6: X1.21
FMC_GP_S7: X1.23
GND: R9.1 X1.1 X1.7 X1.18 X1.33 X1.39 X1.45 X1.51 X1.57 X1.63 X1.69 X1.75 | length 2.1
  Bottom Layer w0.3: X1.18 2.919,10 3.169,10.25 v1(3.25,10.25)
  other v1: 4.5,5.75 3.25,7.25 3.25,8.75 3.25,14.5 3.25,16 3.25,17.5
I2C_SCL: X1.60
I2C_SDA: X1.58
I2S_CLK: X1.8
I2S_IN: X1.14
I2S_OUT: X1.12
I2S_WS: X1.10
nALERT: X1.62
NetQ1_1_1: Q1_1.1 R1_1.2 R2_1.1 | length 3.5
  Top Layer w0.3: R1_1.2 9.275,16.675 10.725,16.675 Q1_1.1 10.75,17.25 10.25,17.75 R2_1.1
NetQ1_2_1: Q1_2.1 R1_2.2 R2_2.1 | length 3.5
  Top Layer w0.3: R1_2.2 15.775,16.675 17.225,16.675 Q1_2.1 17.25,17.25 16.75,17.75 R2_2.1
NetQ1_3_1: Q1_3.1 R1_3.2 R2_3.1 | length 3.5
  Top Layer w0.3: R1_3.2 22.275,16.675 23.725,16.675 Q1_3.1 23.75,17.25 23.25,17.75 R2_3.1
NetQ1_4_1: Q1_4.1 R1_4.2 R2_4.1 | length 3.5
  Top Layer w0.3: R1_4.2 28.775,16.675 30.225,16.675 Q1_4.1 30.25,17.25 29.75,17.75 R2_4.1
nLED1: X1.6
nLED2: X1.16
PWM_1_5: J2_1.1 J2_1.4 R2_1.2 | length 4.7
  Top Layer w0.3: J2_1.4 J2_1.1 11,20 11.75,19.25 R2_1.2
PWM_2_6: J2_2.1 J2_2.4 R2_2.2 | length 4.7
  Top Layer w0.3: J2_2.4 J2_2.1 17.5,20 18.25,19.25 R2_2.2
PWM_3_7: J2_3.1 J2_3.4 R2_3.2 | length 4.7
  Top Layer w0.3: J2_3.4 J2_3.1 24,20 24.75,19.25 R2_3.2
PWM_4_8: J2_4.1 J2_4.4 R2_4.2 | length 4.7
  Top Layer w0.3: J2_4.4 J2_4.1 30.5,20 31.25,19.25 R2_4.2
SW1: D1_1.2 J1_1.2 Q1_1.3
SW2: D1_2.2 J1_2.2 Q1_2.3
SW3: D1_3.2 J1_3.2 Q1_3.3
SW4: D1_4.2 J1_4.2 Q1_4.3
UART_RX: X1.32
UART_TX: X1.22
pads on no net: J10.H X1.2 X1.4 X1.20 X1.34 X1.36 X1.40 X1.42 X1.44 X1.46 X1.48 X1.50 X1.52 X1.54 X1.56 X1.64 X1.66 X1.68 X1.70 X1.72 X1.74

## Polygon pours and split planes (outlines as drawn)
GND on Bottom Layer "NONET_L-01_P-001" (solid, pour order 22): 0,26 0,4 42,4 42,26
BAT- on Bottom Layer "BAT-_L04_P021" (solid, pour order 21): 5,6.25 5.5,5.75 7,5.75 7.25,5.5 7.25,2.25 43.75,2.25 43.75,27 5,27 5,26.5
BAT- on Bottom Layer "BAT-_L04_P028" (solid, pour order 28): 35.75,19.5 35.25,19 35.25,17.25 35.75,16.75 38.25,16.75 38.75,17.25 38.75,19 38.25,19.5
BAT- on Bottom Layer "BAT-_L04_P027" (solid, pour order 27): 35.75,8 35.25,7.5 35.25,5.5 35.75,5 38.25,5 38.75,5.5 38.75,7.5 38.25,8
BAT+ on Bottom Layer "BAT+_L04_P020" (solid, pour order 20): 36.75,25 35,23.25 35,22.75 36.75,21 37.25,21 39,22.75 39,23.25 37.25,25
BAT+ on Bottom Layer "BAT+_L04_P000" (solid, pour order 0): 36.75,11.25 35.25,9.75 35.25,9.25 36.75,7.75 37.25,7.75 38.75,9.25 38.75,9.75 37.25,11.25
GND on Top Layer "NONET_L-01_P-001" (solid, pour order 24): 0,26 0,4 42,4 42,26
BAT- on Top Layer "BAT-_L01_P032" (solid, pour order 32): 29.75,15.5 28.75,14.5 28.75,13.5 30.25,13.5 30.75,14 30.75,15.5
BAT- on Top Layer "BAT-_L01_P031" (solid, pour order 31): 23.25,15.5 22.25,14.5 22.25,13.5 23.75,13.5 24.25,14 24.25,15.5
BAT- on Top Layer "BAT-_L01_P030" (solid, pour order 30): 16.75,15.5 15.75,14.5 15.75,13.5 17.25,13.5 17.75,14 17.75,15.5
BAT- on Top Layer "BAT-_L01_P029" (solid, pour order 29): 10.25,15.5 9.25,14.5 9.25,13.5 10.75,13.5 11.25,14 11.25,15.5
BAT- on Top Layer "BAT-_L01_P023" (solid, pour order 23): 5,6.25 5.5,5.75 7,5.75 7.25,5.5 7.25,2.25 43.75,2.25 43.75,27 5,27 5,26.5
BAT- on Top Layer "BAT-_L01_P026" (solid, pour order 26): 35.75,19.5 35.25,19 35.25,17.25 35.75,16.75 38.25,16.75 38.75,17.25 38.75,19 38.25,19.5
BAT- on Top Layer "BAT-_L01_P025" (solid, pour order 25): 35.75,8 35.25,7.5 35.25,5.5 35.75,5 38.25,5 38.75,5.5 38.75,7.5 38.25,8
BAT+ on Top Layer "BAT+_L01_P019" (solid, pour order 19): 36.75,25 35,23.25 35,22.75 36.75,21 37.25,21 39,22.75 39,23.25 37.25,25
BAT+ on Top Layer "BAT+_L01_P018" (solid, pour order 18): 36.75,11.25 35.25,9.75 35.25,9.25 36.75,7.75 37.25,7.75 38.75,9.25 38.75,9.75 37.25,11.25
BAT+ on Top Layer "BAT+_L01_PWM2" (solid, pour order 13): 15,13.25 14.5,12.75 14.5,5.5 15,5 17,5 17.5,5.5 17.5,13.25
SW4 on Top Layer "SW4_L01_PWM4" (solid, pour order 16): 30.5,7.25 33,7.25 33.5,7.75 33.5,17 33,17.5 31.75,17.5 31.25,17 31.25,14 30.5,13.25
SW3 on Top Layer "SW3_L01_PWM3" (solid, pour order 14): 24,7.25 26.5,7.25 27,7.75 27,17 26.5,17.5 25.25,17.5 24.75,17 24.75,14 24,13.25
BAT+ on Top Layer "BAT+_L01_PWM4" (solid, pour order 17): 28,13.25 27.5,12.75 27.5,5.5 28,5 30,5 30.5,5.5 30.5,13.25
BAT+ on Top Layer "BAT+_L01_PWM3" (solid, pour order 15): 21.5,13.25 21,12.75 21,5.5 21.5,5 23.5,5 24,5.5 24,13.25
SW2 on Top Layer "SW2_L01_PWM2" (solid, pour order 12): 17.5,7.25 20,7.25 20.5,7.75 20.5,17 20,17.5 18.75,17.5 18.25,17 18.25,14 17.5,13.25
SW1 on Top Layer "SW1_L01_PWM1" (solid, pour order 8): 11,7.25 13.5,7.25 14,7.75 14,17 13.5,17.5 12.25,17.5 11.75,17 11.75,14 11,13.25
BAT+ on Top Layer "BAT+_L01_PWM1" (solid, pour order 11): 8.5,13.25 8,12.75 8,5.5 8.5,5 10.5,5 11,5.5 11,13.25
BAT+ on Int2 (PWR) (split plane): 41.49,16.839 41.445,16.828 41.269,16.765 41.099,16.685 40.939,16.588 40.788,16.477 40.649,16.351 40.523,16.212 40.412,16.061 40.315,15.901 40.235,15.731 40.172,15.555 40.126,15.373 40.099,15.187 40.09,15.003 40.09,15 40.09,14.997 40.099,14.813 40.126,14.627 40.172,14.445 40.235,14.269 40.315,14.099 40.412,13.939 40.523,13.788 40.649,13.649 40.788,13.523 40.939,13.412 41.099,13.315 41.269,13.235 41.445,13.172 41.49,13.161 41.49,4.51 4.51,4.51 4.51,4.575 4.51,4.584 4.502,4.707 4.476,4.836 4.433,4.962 4.375,5.08 4.301,5.19 4.214,5.289 4.115,5.376 4.005,5.45 3.887,5.508 3.761,5.551 3.632,5.577 3.509,5.585 3.5,5.585 0.51,5.585 0.51,11.265 2.9,11.265 2.902,11.265 3.045,11.274 3.187,11.302 3.325,11.349 3.455,11.413 3.576,11.494 3.685,11.59 3.781,11.699 3.862,11.82 3.926,11.95 3.973,12.088 4.001,12.23 4.01,12.373 4.01,12.375 4.01,12.377 4.001,12.52 3.973,12.662 3.926,12.8 3.862,12.93 3.781,13.051 3.685,13.16 3.576,13.256 3.455,13.337 3.325,13.401 3.187,13.448 3.045,13.476 2.902,13.485 2.9,13.485 0.51,13.485 0.51,24.415 3.5,24.415 3.509,24.415 3.632,24.423 3.761,24.449 3.887,24.492 4.005,24.55 4.115,24.624 4.214,24.711 4.301,24.81 4.375,24.92 4.433,25.038 4.476,25.164 4.502,25.293 4.51,25.416 4.51,25.425 4.51,25.477 41.49,25.477
BAT- on Int1 (GND) (split plane): 41.49,16.839 41.445,16.828 41.269,16.765 41.099,16.685 40.939,16.588 40.788,16.477 40.649,16.351 40.523,16.212 40.412,16.061 40.315,15.901 40.235,15.731 40.172,15.555 40.126,15.373 40.099,15.187 40.09,15.003 40.09,15 40.09,14.997 40.099,14.813 40.126,14.627 40.172,14.445 40.235,14.269 40.315,14.099 40.412,13.939 40.523,13.788 40.649,13.649 40.788,13.523 40.939,13.412 41.099,13.315 41.269,13.235 41.445,13.172 41.49,13.161 41.49,4.51 4.51,4.51 4.51,4.575 4.51,4.584 4.502,4.707 4.476,4.836 4.433,4.962 4.375,5.08 4.301,5.19 4.214,5.289 4.115,5.376 4.005,5.45 3.887,5.508 3.761,5.551 3.632,5.577 3.509,5.585 3.5,5.585 0.51,5.585 0.51,11.265 2.9,11.265 2.902,11.265 3.045,11.274 3.187,11.302 3.325,11.349 3.455,11.413 3.576,11.494 3.685,11.59 3.781,11.699 3.862,11.82 3.926,11.95 3.973,12.088 4.001,12.23 4.01,12.373 4.01,12.375 4.01,12.377 4.001,12.52 3.973,12.662 3.926,12.8 3.862,12.93 3.781,13.051 3.685,13.16 3.576,13.256 3.455,13.337 3.325,13.401 3.187,13.448 3.045,13.476 2.902,13.485 2.9,13.485 0.51,13.485 0.51,24.415 3.5,24.415 3.509,24.415 3.632,24.423 3.761,24.449 3.887,24.492 4.005,24.55 4.115,24.624 4.214,24.711 4.301,24.81 4.375,24.92 4.433,25.038 4.476,25.164 4.502,25.293 4.51,25.416 4.51,25.425 4.51,25.477 41.49,25.477

## Other copper
Top Layer:
  region net GND: 41.79,12.007 cw(c42,15) 41.79,17.993 41.79,16.637 ccw(c42,15) 41.79,13.363
  pour cut-out: 2.254,13.321 0.321,13.321 0,13 0,12.992 2.256,12.992
  text "1" at 41.25,20.55 h0.5 r90
  text "top" at 41.183,18.85 h0.5 r90
Bottom Layer:
  region net GND: 41,12 cw(c41,15) 41,18 41.79,18 41.79,16.637 ccw(c42,15) 41.79,13.363 41.79,12
  pour cut-out: 2.254,25 2.254,4 0,4 0,25
  text "bot" at 41.15,24.25 h0.5 r90
  text "4" at 41.25,22.75 h0.5 r90
Int1 (GND) (plane layer: these items are gaps in the copper):
  text "2" at 41.25,21.05 h0.5 r90
Int2 (PWR) (plane layer: these items are gaps in the copper):
  text "3" at 41.25,21.75 h0.5 r90

## Silkscreen, mask and mechanical layers (free items; w line width, h text height)
Top Overlay:
  lines w0.254: 8,25.5 14,25.5 14,4.5 8,4.5 8,25.5 ; 8,25.5 4.5,25.5 4.5,11 8,11 8,25.5 ; 14.5,4.5 20.5,4.5 20.5,25.5 14.5,25.5 14.5,4.5 ; 21,4.5 27,4.5 27,25.5 21,25.5 21,4.5 ; 27.5,4.5 33.5,4.5 33.5,25.5 27.5,25.5 27.5,4.5
  text "PWM" at 4.5,24 h1.52
  text "+" at 39.004,22.671 h2
  text "4V7 / 4A" at 38.5,19 h1
  text "-" at 39.004,17.254 h2
  text "J2 / R1 / R2 / Q / D / J1 / C" at 4.5,11 h1
  text "+" at 40.004,9.921 h2
  text "1" at 8,4.5 h1.52
  text "5" at 12.5,4.5 h1.52
  text "2" at 14.5,4.5 h1.52
  text "6" at 19,4.5 h1.52
  text "3" at 21,4.5 h1.52
  text "7" at 25.5,4.5 h1.52
  text "4" at 27.5,4.5 h1.52
  text "8" at 32,4.5 h1.52
  text "-" at 40.004,4.254 h2
Bottom Overlay:
  text "PWM" at 36.5,13.75 h2.5
Top Solder:
  region: 42,12 cw(c42,15) 42,18
Bottom Solder:
  region: 41,12 cw(c41,15) 41,18 42,18 42,12
Mechanical 4:
  the board outline again, w0
Mechanical 6:
  lines w0.1: 25.967,12 cw(c25.967,15) 22.967,15 cw(c25.967,15) 25.967,18 ; 29,4 29.75,4 30,4.25 ; 29,26 29.75,26 30,25.75 ; 29.148,11.3 30.148,11.3 30.148,12.9 ; 29.148,17.3 30.148,17.3 30.148,15.7 ; 29.75,0 30,0.25 30,4.25 ; 29.75,30 30,29.75 30,25.75 ; 30,12 cw(c30,15) 27,15 cw(c30,15) 30,18 ; 4,4.25 4,0.25 4.25,0 41.75,0 42,0.25 42,4.25 ; 4,4.25 4,4.575 ccw(c3.5,4.575) 3.5,5.075 0,5.075 0,11.775 2.9,11.775 ccw(c2.9,12.375) 3.5,12.375 ccw(c2.9,12.375) 2.9,12.975 0,12.975 0,24.925 3.5,24.925 ccw(c3.5,25.425) 4,25.425 4,25.75 ; 4,4.25 4.25,4 5,4 41,4 41.75,4 42,4.25 ; 4,25.75 4,29.75 4.25,30 41.75,30 42,29.75 42,25.75 ; 4,25.75 4.25,26 5,26 41,26 41.75,26 42,25.75 ; 30,4.25 30,13.6 cw(c30,15) 28.6,15 cw(c30,15) 30,16.4 30,25.75 ; 39,15 ccw(c42,15) 42,12 ; 39,15 cw(c42,15) 42,18 ; 39,15 39,15 ; 42,4.25 42,13.6 ; 42,12 42,13.6 ; 42,12 41,12 cw(c41,15) 38,15 cw(c41,15) 41,18 42,18 ; 42,13.6 cw(c42,15) 40.6,15 cw(c42,15) 42,16.4 ; 42,16.4 42,18 ; 42,16.4 42,25.75 ; 23.967,15 23.967,15
  text "TYPE2230" at 21.35,4.35 h1
  text "TYPE2242" at 33.35,4.35 h1
  text "TYPE3030" at 21.35,0.35 h1
  text "TYPE3042" at 33.35,0.35 h1

## Text inside footprints (layer, text, board x,y; h text height)
X1: Top Overlay "1" at 2.55,6 h0.75 r270; Top Overlay "75" at 2.45,24.5 h0.75 r270; Mechanical 1 "Board Edge" at -1.65,19 h0.8 r270; Mechanical 1 "Final Board Thickness: 0.8 +-0.08mm" at -3.85,24.3 h0.8 r270; Mechanical 1 "All pads hard gold finished" at 0.05,29.8 h0.5 r270; Mechanical 1 "20-degree chamfered border from this line" at -5.15,5 h0.5 r270; Bottom Overlay "74" at 2.415,23.318 h0.75 r270; Bottom Overlay "2" at 2.35,5.6 h0.75 r270